# EAGLE board Esquema (EAGLE 9.6.2)
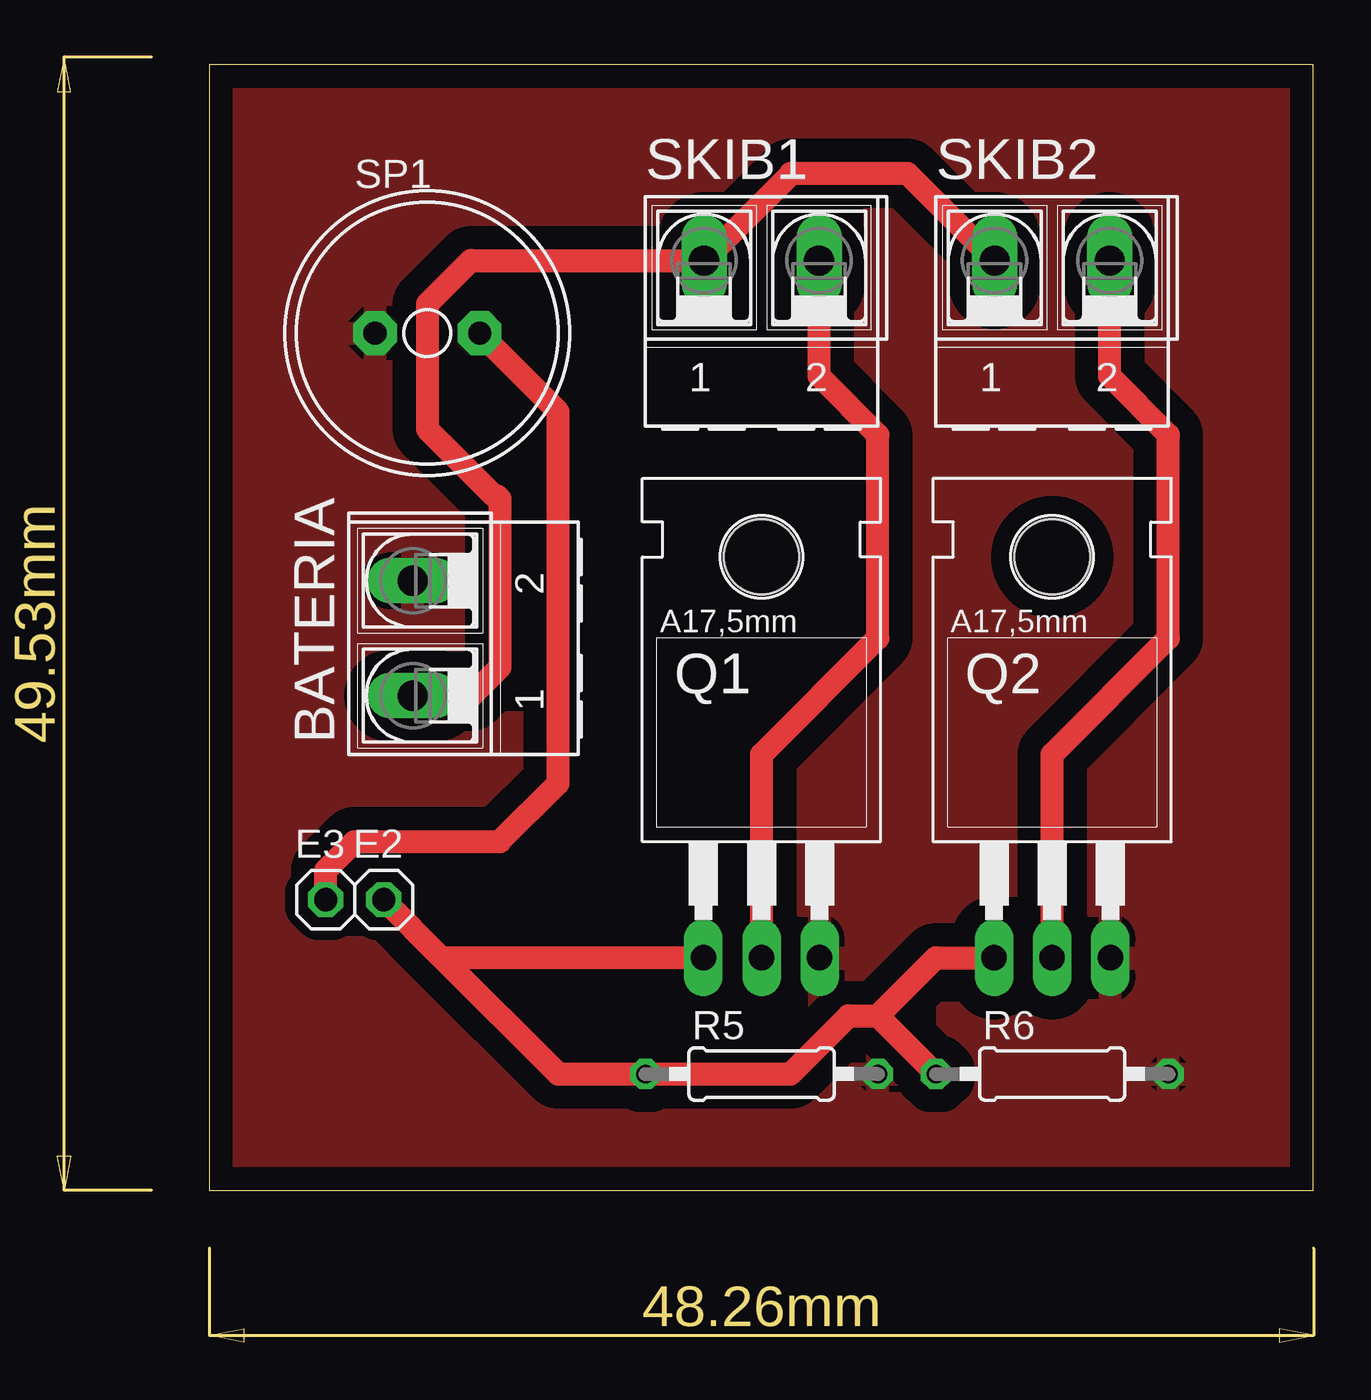
[diagram p0: board, top side]

Size 48.24 x 49.2 mm. Coordinates in mm from the lower left corner, seen from the top.
Outline: 0,0 48.24,0 48.24,49.2 0,49.2 0,0
Copper layers (1*16): Top 0.035mm / dielectric 1.5mm / Bottom 0.035mm
Design rules "default *": minimum track width 1mm, minimum drill 0.35mm, track to track 40mil, track to pad 0.5mm, pad to pad 6mil, via to via 6mil, smd to smd 6mil, copper to edge 40mil, drill to drill 6mil, minimum pad ring 10mil, minimum via ring 8mil, stop-mask expansion 4mil, vias tented up to drill 0mil, thermal gap 10mil

## Footprints (pad centres in the part's own frame; a part is rotated, then mirrored left to right if it is on the bottom)
AK500/2-H = drill 1.321 long: 1 -2.515,0; 2 2.515,0
1X01 = drill 1.016 octagon: 1 0,0
TO220 = drill 1.118 long: 1 -2.54,-6.35; 2 0,-6.35; 3 2.54,-6.35 | hole 3.302: 0,11.176
0207/10 = drill 0.813 octagon: 1 -5.08,0; 2 5.08,0
AL11P = drill 1.016 pad 1.905 octagon: + 2.286,0; - -2.286,0

## Placement (x,y rotation side)
BATERIA  [AK500/2-H]  8.89,24.13 90 top
E2  [1X01]  7.62,12.7 0 top
E3  [1X01]  5.08,12.7 0 top
Q1  IRF540  [TO220]  24.13,16.51 0 top
Q2  IRF540  [TO220]  36.83,16.51 0 top
R5  1k  [0207/10]  24.13,5.08 0 top
R6  1k  [0207/10]  36.83,5.08 0 top
SKIB1  [AK500/2-H]  24.13,40.64 0 top
SKIB2  [AK500/2-H]  36.83,40.64 0 top
SP1  AL11P  [AL11P]  9.53,37.47 0 top

## Library data of the parts
BATERIA SKIB1 SKIB2 = con-ptr500; OC_FARNELL: unknown; OC_NEWARK: unknown
E2 E3 = pinhead
Q1 Q2 = transistor-fet
R5 R6 = rcl; SPICEPREFIX: R
SP1 = buzzer; OC_FARNELL: unknown; OC_NEWARK: unknown

## Nets
BUZZER: E3.1 SP1.+
GND: BATERIA.2 Q1.3 Q2.3 R5.2 R6.2 SP1.-
PARACHUTE: E2.1 Q1.1 Q2.1 R5.1 R6.1
SKIB1: Q1.2 SKIB1.2
SKIB2: Q2.2 SKIB2.2
VCC: BATERIA.1 SKIB1.1 SKIB2.1

## Tracks (layer width: path | path; a pad name or v marks a point on that pad's centre or on a via)
BUZZER
  Top 1: SP1.+ 15.24,34.04 15.24,17.78 12.7,15.24 6.35,15.24 5.08,13.97 E3.1
GND
  pour Top: 1.27,48.26 1.27,1.27 46.99,1.27 46.99,48.26
PARACHUTE
  Top 1: Q1.1 10.16,10.16 | E2.1 10.16,10.16 | 10.16,10.16 15.24,5.08 R5.1 25.4,5.08 27.94,7.62 29.21,7.62 | R6.1 29.21,7.62 | 29.21,7.62 31.75,10.16 Q2.1
SKIB1
  Top 1: Q1.2 24.13,19.05 29.21,24.13 29.21,33.02 26.64,35.59 SKIB1.2
SKIB2
  Top 1: Q2.2 36.83,19.05 41.91,24.13 41.91,33.02 39.34,35.59 SKIB2.2
VCC
  Top 1: SKIB2.1 30.5,44.45 25.4,44.45 25.4,44.42 SKIB1.1 11.43,40.64 9.53,38.73 9.53,33.27 12.45,30.35 12.57,30.35 12.7,30.23 12.7,22.86 11.43,21.59 8.91,21.59 BATERIA.1